# Altium PCB Test Plates - SMD to PLS Adapters m.PcbDoc
Units mm, origin at the board's own origin, x right, y up, seen from the top; angles counter-clockwise.
Board outline 100 x 50 mm, 2 copper layers (Top Layer, Bottom Layer); 22 components, 34 nets, 84 pads, 0 vias.
Unrouted connection lines stored in the file: 28.
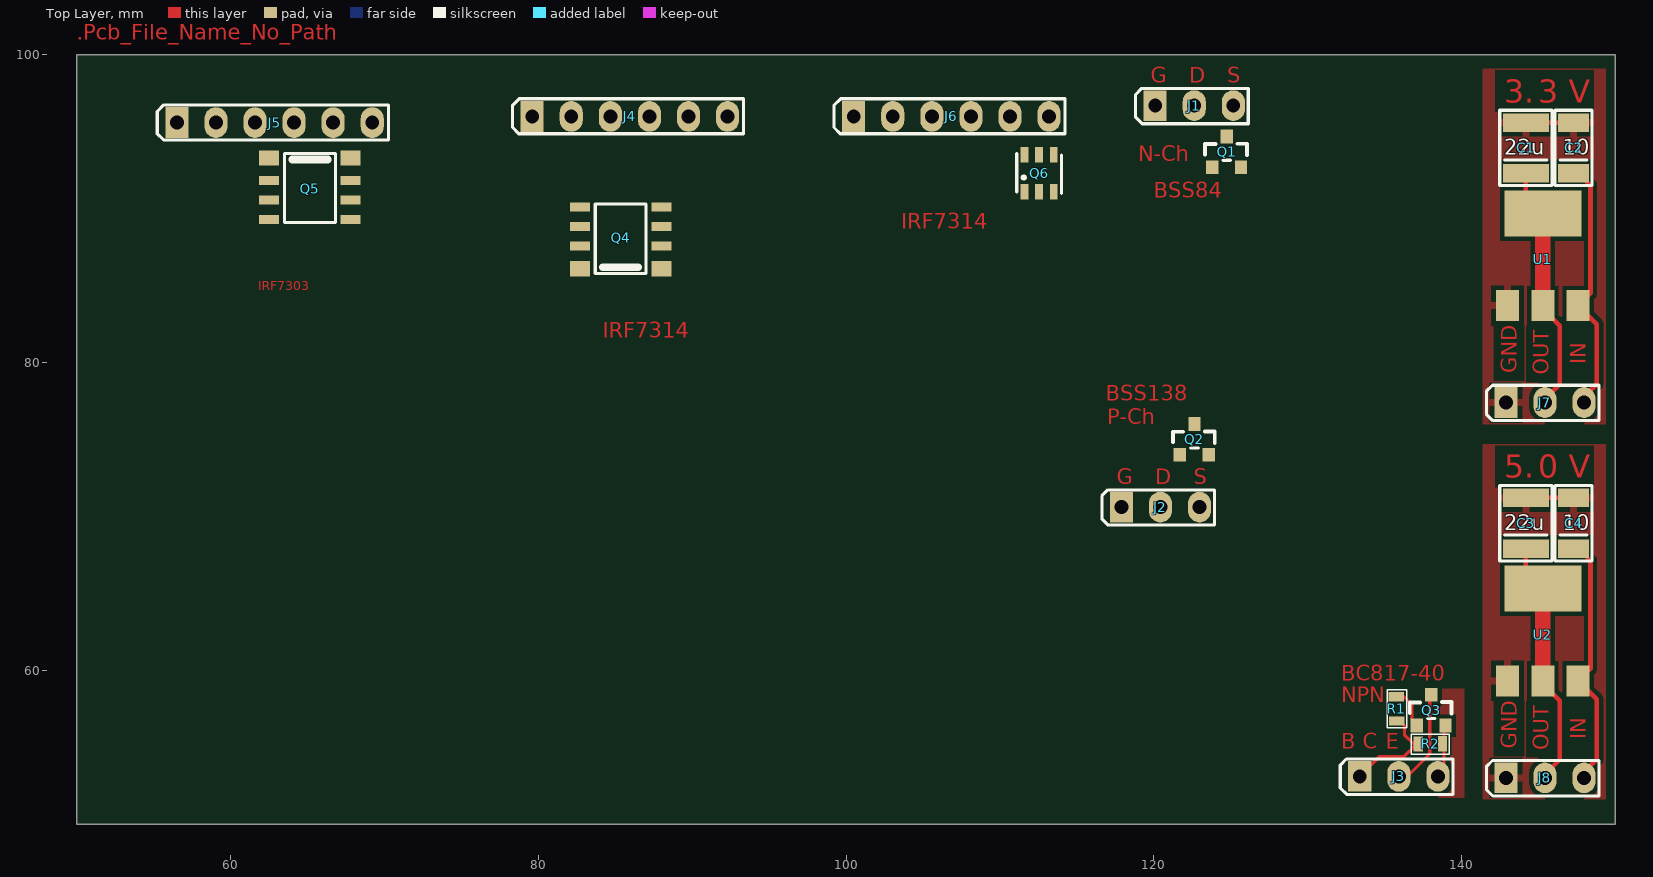
[diagram p0: Top Layer view]
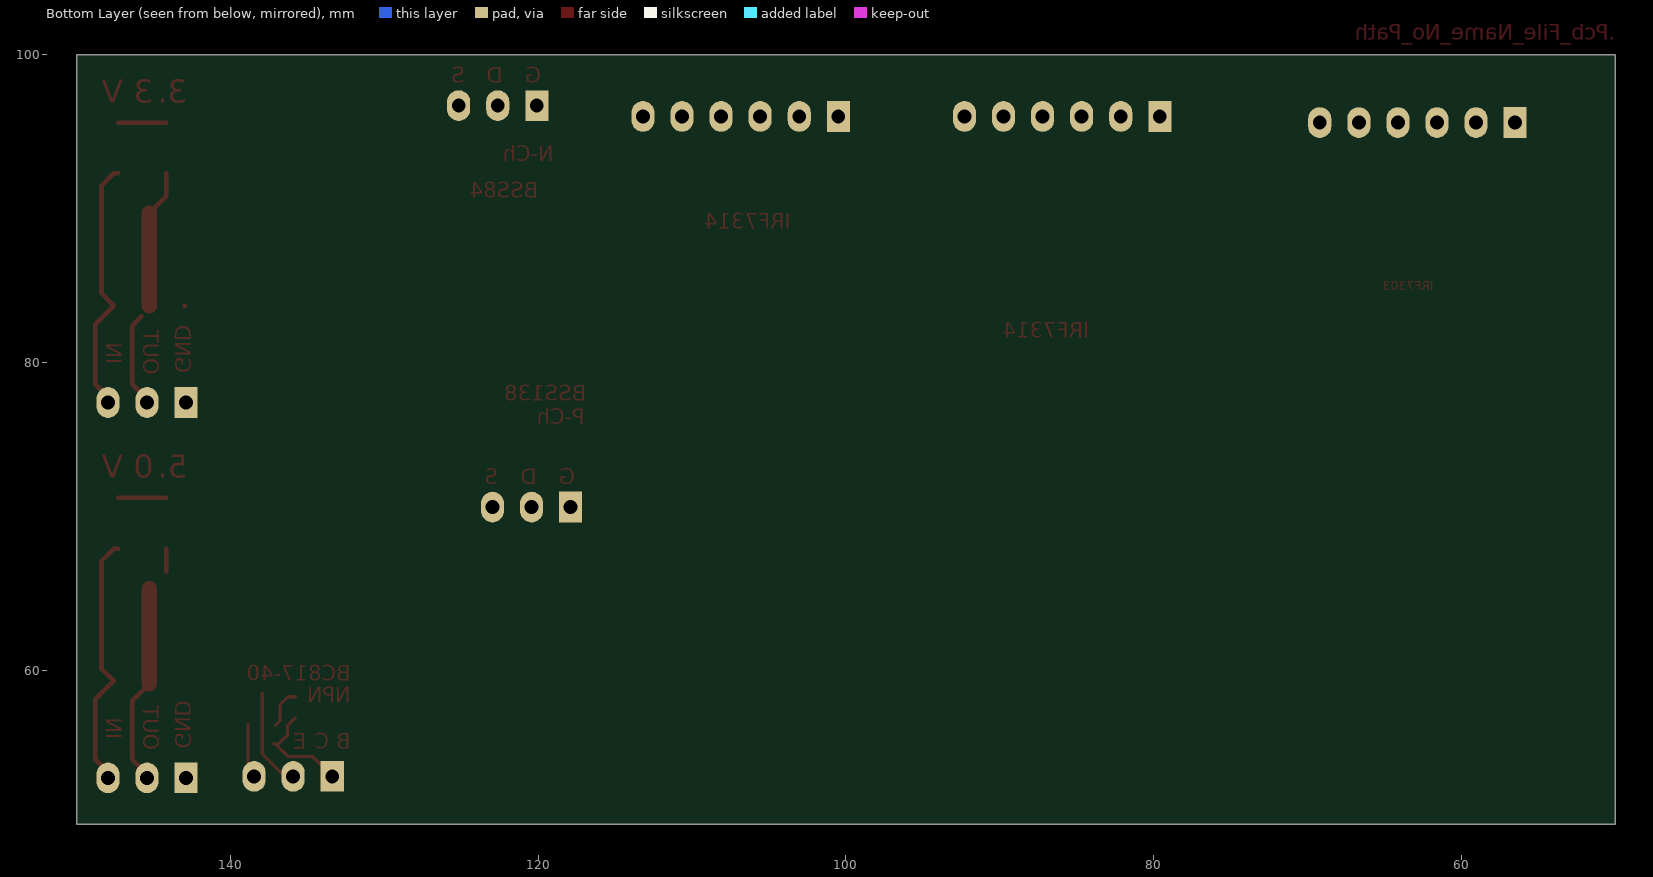
[diagram p1: Bottom Layer view, seen from below]

## Layer stack, top to bottom
Top Solder: solder mask 0.0102, Solder Resist, Dk 3.5
Top Layer: signal copper 0.0356
Dielectric 1: dielectric 0.32, FR-4, Dk 4.8
Bottom Layer: signal copper 0.0356
Bottom Solder: solder mask 0.0102, Solder Resist, Dk 3.5

## Board outline
50,50 150,50 150,100 50,100

## Design rules (kind name [scope] priority, off if disabled: settings)
Clearance [All] p1: gap=0.3
ComponentClearance [All] p1: gap=0.01 collisioncheckmode=3 verticalgap=0.2 showdistances=FALSE
Height [All] p1: minheight=0 maxheight=25 prefheight=12.7
HoleSize [All] p1: absolutevalues=TRUE maxlimit=3.2 minlimit=0.4 maxpercent=80.000 minpercent=20.000
HoleToHoleClearance [All] p1: gap=0.2 allowstackedmicrovias=TRUE
PlaneClearance [All] p1: clearance=0.5
PlaneConnect [All] p1: planeconnectstyle=Relief reliefexpansion=0.508 reliefentries=4 reliefconductorwidth=0.5 reliefairgap=0.3
PolygonConnect [All] p1: connectstyle=Relief reliefconductorwidth=0.5 reliefentries=4 polygonreliefangle="90 Angle" airgapwidth=0.3
RoutingVias [All] p1: holewidth=0.7 width=1.5 viastyle="Through Hole" minholewidth=0.4 minwidth=0.4 maxholewidth=3.2 maxwidth=7
SilkToSilkClearance [All] p1: silktosilkclearance=0.05
SilkToSolderMaskClearance [IsPad] p1: minsilkscreentomaskgap=0.2 clearancetoexposedcopper=TRUE
SolderMaskExpansion [All] p1: expansion=0.1
Width [All] p1: maxlimit=3 minlimit=0.2 preferedwidth=0.5
21 further rules are at their usual default settings.

## Components (designator, comment, footprint, x,y, rotation, side; value= is the part's Value field where it differs from the comment)
C1 "22u" "SMD 3528 Tantal (1210)" 144.2,92.3 r90 top
C2 "10" "SMD 1206 Tantal (3216)" 147.3,92.3 r90 top
C3 "22u" "SMD 3528 Tantal (1210)" 144.2,67.9 r90 top
C4 "10" "SMD 1206 Tantal (3216)" 147.3,67.9 r90 top
J1 "PLS-3" "Line 2.54 X 3" 120.1,96.7 r90 top
J2 "PLS-3" "Line 2.54 X 3" 117.9,70.6 r90 top
J3 "PLS-3" "Line 2.54 X 3" 133.4,53.099 r90 top
J4 "connector" "Line 2.54 x 6" 79.6,96 r90 top
J5 "connector" "Line 2.54 x 6" 56.5,95.6 r90 top
J6 "connector" "Line 2.54 x 6" 100.5,96 r90 top
J7 "AMS1117 3.3 / 5.0" "Line 2.54 X 3" 142.9,77.4 r90 top
J8 "AMS1117 3.3 / 5.0" "Line 2.54 X 3" 142.9,53 r90 top
Q1 "BSS84" SOT-23 123.8,92.7 r0 top
Q2 "BSS138" SOT-23 121.7,74 r0 top
Q3 "BC817-40" SOT-23 137.1,56.399 r0 top
Q4 "IRF7314" SO8 88,86.3 r180 top
Q5 "IRF7303" SO8 62.5,93.1 r0 top
Q6 "IRF7314" TSOP-6 111.6,91.1 r90 top
R1 "1kOm" "SMD 0603 (1608)" 135.8,56.699 r90 top
R2 "10KOm" "SMD 0603 (1608)" 137.2,55.199 r0 top
U1 "AMS 1117 3.3/5.0" "SOT-223-3 (AMS)" 145.3,90.7 r0 top
U2 "AMS 1117 3.3/5.0" "SOT-223-3 (AMS)" 145.3,66.3 r0 top

## Footprints (in the part's own frame and the unit in brackets; to place one, negate y for a bottom-side part, rotate by r counter-clockwise, add the part's x,y. Pads: shape width x height; smd on the part's side, far side on the other; paste and mask are expansions set on the pad)
"Line 2.54 X 3" [mm]
  rect 2x1.5 hole 0.9: 1(0,0)
  oval 2x1.5 hole 0.9: 2(0,-2.54) 3(0,-5.08)
  silkscreen extent -1.17,-6.05 1.12,1.27, body extent -1.27,-6.24 1.22,1.38, height 8.2
"Line 2.54 x 6" [mm]
  rect 2x1.5 hole 0.9: 1(0,0)
  oval 2x1.5 hole 0.9: 2(0,-2.54) 3(0,-5.08) 4(0,-7.62) 5(0,-10.16) 6(0,-12.7)
  silkscreen extent -1.12,-13.75 1.15,1.28, body extent -1.25,-13.86 1.25,1.38, height 8.2
"SMD 0603 (1608)" [mm]
  rect 0.6x1 smd: 1(0,0) 2(1.575,0.025)
  silkscreen extent -0.45,-0.65 2.02,0.63, body extent 0.03,-0.4 1.58,0.45, height 0.45
"SMD 1206 Tantal (3216)" [mm]
  rect 1.2x2 smd: GND(3.3,0) VCC(0,0)
  silkscreen extent -0.8,-1.2 4.1,1.2, body extent -0.05,-0.9 3.35,0.9, height 1.8
"SMD 3528 Tantal (1210)" [mm]
  rect 1.2x3 smd: GND(3.3,0) VCC(0,0)
  silkscreen extent -0.8,-1.7 4.1,1.7, body extent -0.2,-1.46 3.5,1.47, height 2.03
SO8 [mm]
  rect 1.3x1 smd: 1(0,0.2) 8(5.3,0.2)
  rect 1.3x0.6 smd: 2(0,-1.27) 3(0,-2.54) 4(0,-3.81) 5(5.3,-3.81) 6(5.3,-2.54) 7(5.3,-1.27)
  silkscreen extent 1,-4 4.3,0.5, body extent -0.32,-4.33 5.67,0.57, height 1.6
SOT-23 [mm]
  rect 0.8x0.9 smd: 1(0,0) 2(1.875,0) 3(0.95,2)
  silkscreen extent -0.45,0.45 2.27,1.53, body extent -0.57,-0.32 2.43,2.32, height 1.08
"SOT-223-3 (AMS)" [mm]
  rect 1.5x2 smd: 1(-2.3,-7) 2(0,-7) 3(2.3,-7)
  rect 5x3 smd: 2(0,-1)
  body extent -3.25,-7.37 3.25,-0.38, height 1.85
TSOP-6 [mm]
  rect 1x0.5 smd: 1(0,0) 2(0,-0.95) 3(0,-1.9) 4(2.4,-1.9) 5(2.4,-0.95) 6(2.4,0)
  silkscreen extent -0.1,-2.4 2.5,0.5, body extent -0.15,-2.45 2.55,0.55, height 1

## Part data
C1 C2 C3 C4: library part "Cap Tantal", "Capacitor"
J1 J2 J3: "Vert, Sgl line, Male"
J4 J5 J6: library part PLS-6, "Vert, Sgl line, Male"
J7 J8: library part PLS-3, "Vert, Sgl line, Male"
Q1: "P-Channel -50V - 10-1? - 0.13A"
Q2: "N-Channel 50V - 0.7-1? - 0.22A"
Q3: "NPN 45 V, 500 mA NPN general-purpose transistor"
Q4: "Dual P-Ch  20V - 0.058? - 5.3A"
Q5: "Dual N-Ch  30V - 0.05? - 4.9A"
Q6: library part IRF5850, "Dual P-Ch  20V - 0.135? - 2.2A"
R1 R2: library part "Res SMD 0603"
U1 U2: library part AMS1117_FIX, "Voltage Regulator SOT-223-3"

## Nets (pads, with @x,y where several pads share a name; then routed paths per layer and width w, separated by ;. In a path a pad name is that pad's centre, name@x,y a point inside that pad or via, vN(x,y) a via of type N, cw(c..) or ccw(c..) an arc to the next point about the centre after c; other vN are vias at no path point)
AMS5-GND: C3.GND C4.GND J8.1 U2.1 | length 3.1
  Top Layer w0.3: C3.GND C4.GND
AMS5-IN: C4.VCC J8.3 U2.3 | length 16.4
  Top Layer w0.3: C4.VCC 147.6,67.9 148.4,67.1 148.4,60.1 U2.3 148.8,58.1 148.8,57.8 148.8,54.2 J8.3@147.9,53.3
AMS5-OUT: C3.VCC J8.2 U2.2 | length 14.4
  Top Layer w0.3: U2.2@144.2,66.4 C3.VCC ; U2.2@145.3,59.1 146.4,58 146.4,54.192 J8.2@145.44,53.232
  Top Layer w1: U2.2@145.3,59.1 U2.2@145.3,65.3
AMS33-GND: C1.GND C2.GND J7.1 U1.1 | length 3.1
  Top Layer w0.3: U1.1@143,83.679 U1.1 ; C1.GND C2.GND
AMS33-IN: C2.VCC J7.3 U1.3 | length 16.4
  Top Layer w0.3: C2.VCC 147.6,92.3 148.4,91.5 148.4,84.5 U1.3 148.8,82.5 148.8,82.2 148.8,78.6 J7.3@147.9,77.7
AMS33-OUT: C1.VCC J7.2 U1.2 | length 15.6
  Top Layer w0.3: C1.VCC 144.2,90.8 U1.2@145.3,89.7 ; U1.2@145.3,83.4 U1.2@145.3,83.7 ; J7.2 145.44,77.632 146.4,78.592 146.4,82.4 U1.2@145.8,83
  Top Layer w1: U1.2@145.3,83.7 U1.2@145.3,89.7
B-817: Q3.1 R1.2 | length 2.7
  Top Layer w0.2: R1.2 136.275,58.274 136.799,57.75 136.799,56.7 Q3.1
E-817: J3.2 Q3.3 | length 6.6
  Top Layer w0.2: J3.2 136.5,53.099 137.95,54.549 Q3.3@137.95,58.499
GND1: J3.3 Q3.2 R2.2 | length 3.6
  Top Layer w0.2: J3.3 138.875,53.494 Q3.2@138.875,56.499
NetJ1_1: J1.1 Q1.1
NetJ1_2: J1.2 Q1.3
NetJ1_3: J1.3 Q1.2
NetJ2_1: J2.1 Q2.1
NetJ2_2: J2.2 Q2.2
NetJ2_3: J2.3 Q2.3
NetJ3_1: J3.1 R1.1 R2.1 | length 7
  Top Layer w0.2: J3.1 134.7,54.399 136.291,54.399 137,55.108 R2.1@137,55.199 ; R1.1@135.8,56.899 136.3,56.399 136.3,55.799 136.9,55.199 R2.1
NetJ4_1: J4.1 Q4.2
NetJ4_2: J4.2 Q4.7 Q4.8
NetJ4_3: J4.3 Q4.1
NetJ4_4: J4.4 Q4.4
NetJ4_5: J4.5 Q4.5 Q4.6
NetJ4_6: J4.6 Q4.3
NetJ5_1: J5.1 Q5.2
NetJ5_2: J5.2 Q5.7 Q5.8
NetJ5_3: J5.3 Q5.1
NetJ5_4: J5.4 Q5.4
NetJ5_5: J5.5 Q5.5 Q5.6
NetJ5_6: J5.6 Q5.3
NetJ6_1: J6.1 Q6.1
NetJ6_2: J6.2 Q6.6
NetJ6_3: J6.3 Q6.5
NetJ6_4: J6.4 Q6.3
NetJ6_5: J6.5 Q6.4
NetJ6_6: J6.6 Q6.2

## Polygon pours and split planes (outlines as drawn)
AMS33-GND on Top Layer "Top Layer-No Net" (solid, pour order 2): 149.4,76 141.4,76 141.4,99.1 149.1,99.1 149.4,99.1 149.4,76
AMS5-GND on Top Layer "Top Layer-No Net" (solid, pour order 2): 149.4,51.6 141.4,51.6 141.4,74.7 149.1,74.7 149.4,74.7 149.4,51.6
no net on Top Layer "Top Layer-No Net" (solid, pour order 9): 140.2,51.699 131.7,51.699 131.7,60.999 140.2,60.999

## Other copper
Top Layer:
  pour cut-out: 146.8,79.5 146.855,78.745 148.449,78.745 148.449,79.5
  pour cut-out: 144.5,82.266 144.5,82.5 145.983,82.5 146.117,82.366 146.086,82.335 146.086,82.266
  pour cut-out: 144.5,57.866 144.5,58.1 145.983,58.1 146.117,57.966 146.086,57.935 146.086,57.866
  pour cut-out: 146.8,55.1 146.855,54.345 148.449,54.345 148.449,55.1
  text "100 x 50 mm" at 50,103 h1
  text ".Pcb_File_Name_No_Path" at 50,101 h1
  text "G" at 119.8,98.2 h1
  text "D" at 122.3,98.2 h1
  text "S" at 124.8,98.2 h1
  text "3." at 142.8,96.9 h1.5
  text "3" at 145,96.9 h1.5
  text "V" at 147,96.9 h1.5
  text "N-Ch" at 119,93.1 h1
  text "BSS84" at 120,90.7 h1
  text "IRF7314" at 103.6,88.7 h1
  text "IRF7303" at 61.8,84.5 h1
  text "IRF7314" at 84.2,81.6 h1
  text "IN" at 148.1,79.9 h1 r90
  text "GND" at 143.6,79.3 h1 r90
  text "OUT" at 145.7,79.2 h1 r90
  text "BSS138" at 116.9,77.5 h1
  text "P-Ch" at 117,76 h1
  text "5." at 142.8,72.5 h1.5
  text "0" at 145,72.5 h1.5
  text "V" at 147,72.5 h1.5
  text "G" at 117.6,72.1 h1
  text "D" at 120.1,72.1 h1
  text "S" at 122.6,72.1 h1
  text "BC817-40" at 132.2,59.299 h1
  text "NPN" at 132.2,57.899 h1
  text "IN" at 148.1,55.5 h1 r90
  text "B" at 132.2,54.899 h1
  text "C" at 133.6,54.899 h1
  text "E" at 135.1,54.899 h1
  text "GND" at 143.6,54.9 h1 r90
  text "OUT" at 145.7,54.8 h1 r90